# Altium PCB IBMExtender.PcbDoc (part 2 of 3)
Units mm, origin at the board's own origin, x right, y up, seen from the top; angles counter-clockwise.
Board outline 203.2 x 105.41 mm, 4 copper layers (F.Cu, In1.Cu, In2.Cu, B.Cu); 44 components, 158 nets, 598 pads, 425 vias.
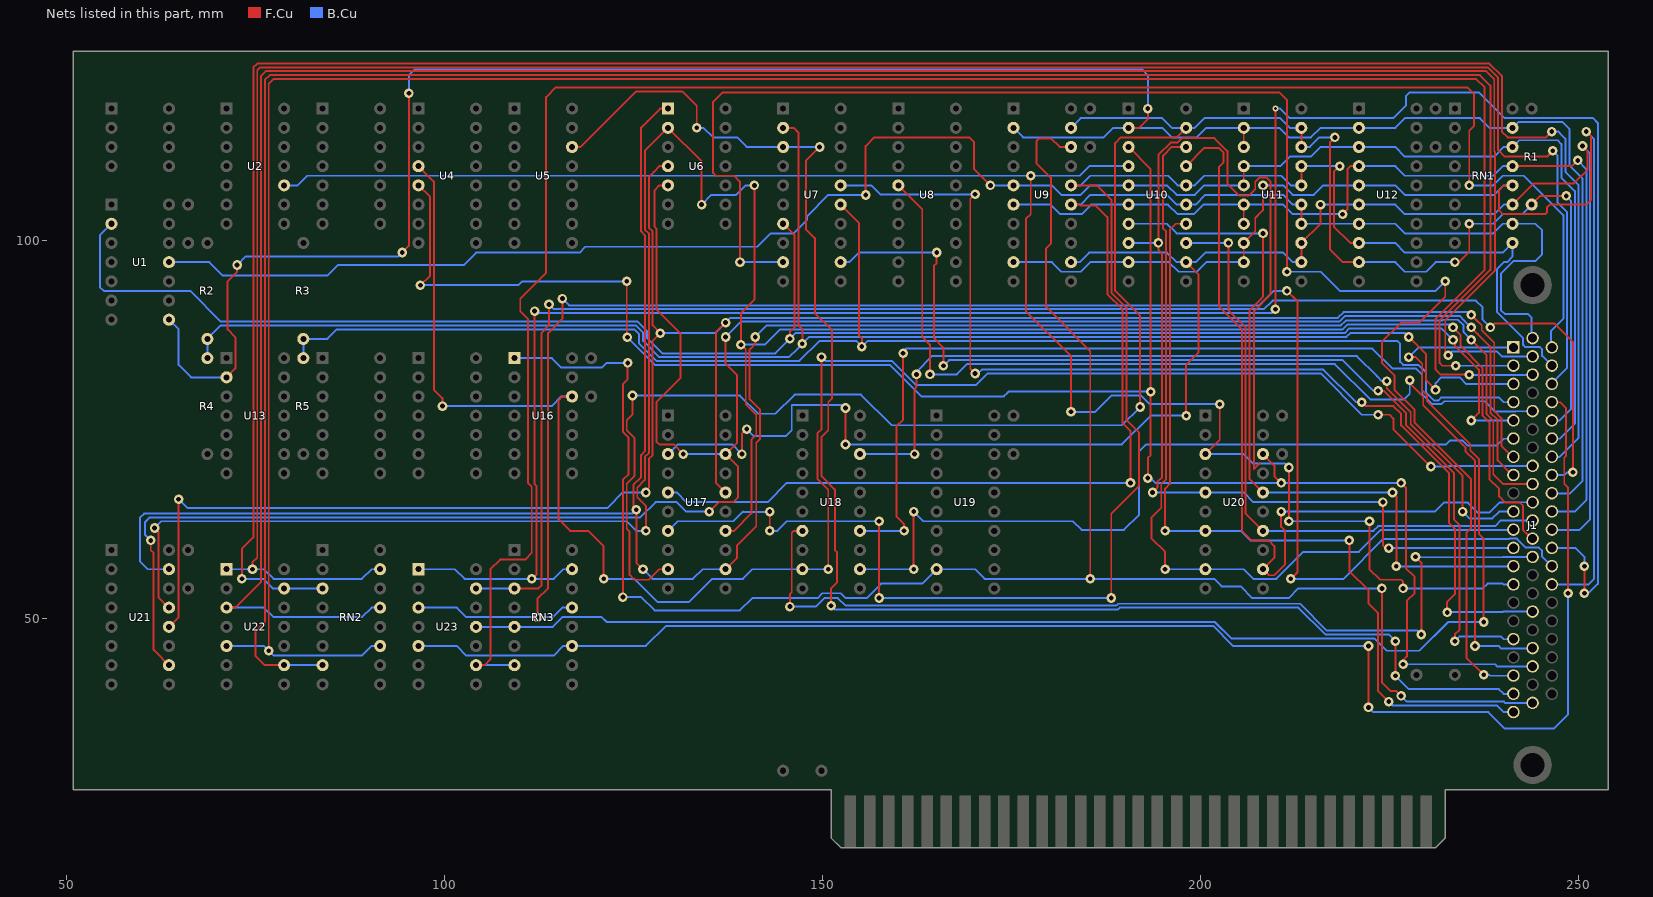
[diagram p4: the nets of this part, all layers, seen from the top]

## Via types
v1: diameter 1.27, hole 0.635, F.Cu to B.Cu, tented both sides, 360 vias
v2: diameter 1.524, hole 0.635, F.Cu to B.Cu, tented both sides, 62 vias
v3: diameter 0.762, hole 0.381, F.Cu to B.Cu, tented both sides, 3 vias

## Nets (pads, with @x,y where several pads share a name; then routed paths per layer and width w, separated by ;. In a path a pad name is that pad's centre, name@x,y a point inside that pad or via, vN(x,y) a via of type N, cw(c..) or ccw(c..) an arc to the next point about the centre after c; other vN are vias at no path point) (continued)
EA7: J1.42 U9.18 U16.1 U19.9 | length 262.8
  F.Cu w0.254: v1(123.571,52.832) 123.571,53.73 123.571,54.61 ; v1@123.571,53.213 123.571,54.61 ; 123.571,56.388 123.571,56.515 ; v1(124.206,83.82) 124.206,81.661 123.571,81.026 123.571,74.676 124.333,73.914 124.333,69.088 123.571,68.326 123.571,56.515 ; U9.18@182.88,112.395 181.356,112.395 180.213,113.538 178.689,113.538 178.308,113.157 178.308,110.236 180.213,108.331 180.213,99.612 179.578,98.977 179.578,91.226 185.42,85.384 185.42,71.965 185.42,56.143 v1(185.42,55.245) ; 224.028,42.291 224.028,42.418 ; v1(224.028,53.975) 224.028,42.418 ; v1(226.568,39.751) 225.933,40.386 225.171,40.386 224.028,41.529 224.028,42.418 ; 123.571,54.61 123.571,56.515
  B.Cu w0.254: U16.1@109.22,84.455 114.173,84.455 115.443,83.185 116.967,83.185 120.777,83.185 121.412,83.82 123.444,83.82 ; v1(123.571,52.832) 125.984,52.832 127.762,51.054 139.065,51.054 140.716,52.705 149.352,52.705 149.987,53.34 151.638,53.34 ; v1@124.079,83.82 123.444,83.82 ; v1(124.206,83.82) 123.444,83.82 ; v1(185.42,55.245) 181.356,55.245 ; 193.802,55.245 193.294,55.245 ; v1(224.028,53.975) 223.139,53.975 212.979,53.975 211.709,52.705 210.82,52.705 206.883,52.705 205.359,54.229 202.819,54.229 201.803,55.245 193.294,55.245 ; v1(226.568,39.751) 227.33,38.989 240.157,38.989 240.309,38.837 J1.42@243.967,38.837 ; 151.003,53.34 150.285,53.34 151.003,53.34 ; 151.003,53.34 151.638,53.34 ; 151.638,53.34 152.4,53.34 153.035,52.705 155.829,52.705 157.734,54.61 163.195,54.61 U19.9@165.1,56.515 166.231,56.515 170.18,56.515 171.45,55.245 181.356,55.245 ; 181.356,55.245 193.294,55.245
EA8: J1.40 U4.5 U10.3 U20.18 | length 252.3
  F.Cu w0.254: U4.5@96.52,107.315 98.044,105.791 98.044,95.504 98.044,95.377 v1(96.774,94.107) ; v1(124.079,94.615) 124.079,87.289 v1(124.162,87.205) ; U10.3@190.5,112.395 193.421,109.474 193.421,100.183 193.421,96.393 v1(193.421,80.01) 193.421,79.121 193.421,77.597 ; v1(193.04,68.58) 193.04,71.247 193.421,71.628 193.421,77.597 ; 193.421,79.375 193.421,77.597 ; U20.18@208.28,71.755 209.804,70.231 209.804,69.342 209.804,68.834 v1(210.693,67.945) ; v1(226.568,67.945) 227.203,67.31 227.203,56.642 228.346,55.499 228.346,53.34 227.33,52.324 227.33,44.989 226.822,44.481 v1(226.822,43.942)
  B.Cu w0.254: v1(96.774,94.107) 109.728,94.107 110.236,94.615 115.951,94.615 ; 116.84,94.615 115.951,94.615 ; 122.047,94.615 120.777,94.615 ; v1(124.079,94.615) 120.777,94.615 ; v1(124.162,87.205) 127.802,83.566 152.654,83.566 158.877,83.566 163.068,79.375 173.101,79.375 173.99,79.375 174.498,79.883 174.625,80.01 192.532,80.01 v1(193.421,80.01) ; v1(193.04,68.58) 193.421,68.58 194.056,67.945 209.804,67.945 v1(210.693,67.945) 211.709,67.945 225.425,67.945 v1(226.568,67.945) ; v1(226.822,43.942) 239.014,43.942 239.319,43.637 240.03,43.637 242.367,43.637 J1.40@243.84,43.637 ; 115.951,94.615 120.777,94.615
EA9: J1.14 U2.10 U10.4 U20.3 | length 234
  F.Cu w0.254: v1(177.546,108.585) 177.546,103.505 176.911,102.87 176.911,90.678 182.88,84.709 v1(182.88,77.343) ; U20.3@200.66,71.755 202.565,73.66 v1(202.565,78.359) ; v1(211.709,62.865) 211.709,69.438 v1(211.709,69.977) ; v1(222.377,62.865) 222.377,56.515 223.774,55.118 226.577,55.118 226.822,54.873 v1(226.822,53.975)
  B.Cu w0.254: U2.10@78.74,107.315 80.518,107.315 81.788,108.585 v1(177.546,108.585) 177.8,108.585 184.023,108.585 185.293,109.855 U10.4@190.5,109.855 ; v1(182.88,77.343) 186.055,77.343 188.214,79.502 192.151,79.502 193.294,78.359 v1(202.565,78.359) ; U20.3@200.66,71.755 201.791,71.755 205.74,71.755 207.01,70.485 211.201,70.485 v1(211.709,69.977) ; v1(211.709,62.865) 218.821,62.865 ; 220.853,62.865 218.821,62.865 ; v1(222.377,62.865) 218.821,62.865 ; v1(226.822,53.975) 237.363,53.975 237.998,54.61 240.006,54.61 240.133,54.483 J1.14@241.3,54.483
EA10: J1.13 U10.7 U20.16 | length 97.8
  F.Cu w0.254: U20.16@208.28,66.675 206.502,68.453 206.502,88.729 206.502,90.805 208.026,92.329 208.28,92.583 v1(208.28,100.965) ; v1(225.425,66.675) 225.933,66.167 225.933,65.532 v1(225.933,56.896)
  B.Cu w0.254: U10.7@190.5,102.235 195.58,102.235 196.85,100.965 207.556,100.965 ; v1@208.026,100.965 207.556,100.965 ; U20.16@208.28,66.675 209.411,66.675 224.663,66.675 ; v1(208.28,100.965) 207.556,100.965 ; v1@225.171,66.675 224.663,66.675 ; v1(225.425,66.675) 224.663,66.675 ; v1(225.933,56.896) 227.584,56.896 228.346,56.896 ; 228.092,56.896 228.346,56.896 ; J1.13@241.3,56.896 240.133,56.896 228.346,56.896
EA11: J1.12 U10.8 U20.5 | length 169.7
  F.Cu w0.254: v1(193.675,66.675) 194.183,67.183 194.31,67.31 194.31,68.072 194.945,68.707 194.945,98.289 194.437,98.797 v1(194.437,99.695) 194.437,98.679 194.437,111.335 196.063,112.962 196.939,112.962 197.553,113.576 201.848,113.576 203.581,111.843 203.581,107.548 205.173,105.956 206.393,105.956 207.264,106.827 207.264,107.803 207.792,108.331 208.768,108.331 209.296,107.803 209.296,92.881 207.099,90.684 207.099,69.782 207.891,70.574 ; v1(224.155,65.405) 224.155,59.69 224.536,59.309 v1(224.917,59.309)
  B.Cu w0.254: U10.8@190.5,99.695 193.675,99.695 ; v1(193.675,66.675) U20.5@200.66,66.675 205.74,66.675 207.01,65.405 209.55,65.405 223.139,65.405 v1(224.155,65.405) ; v1@194.31,99.695 193.675,99.695 ; v1(194.437,99.695) 193.675,99.695 ; v1(224.917,59.309) 226.949,59.309 227.838,59.309 ; 227.457,59.309 227.838,59.309 ; J1.12@241.3,59.309 227.838,59.309
EA12: J1.32 U10.13 U20.14 | length 81.8
  F.Cu w0.254: v1(203.708,99.695) 203.708,90.805 205.994,88.519 205.994,63.881 207.01,62.865 U20.14@208.28,61.595
  B.Cu w0.254: U10.13@198.12,99.695 v1(203.708,99.695) ; U20.14@208.28,61.595 222.885,61.595 223.52,62.23 239.014,62.23 239.751,62.967 J1.32@243.967,62.967
EA13: J1.21 U10.14 U20.7 | length 108
  F.Cu w0.254: v1(195.326,61.595) 195.326,67.183 195.961,67.818 195.961,101.473 196.723,102.235 U10.14@198.12,102.235 ; v1(219.71,60.325) 219.71,56.261 222.25,53.721 222.25,51.943 223.52,50.673 223.52,40.386 v1(224.917,38.989)
  B.Cu w0.254: v1(195.326,61.595) U20.7@200.66,61.595 205.359,61.595 206.629,60.325 212.852,60.325 v1(219.71,60.325) ; v1(224.917,38.989) 225.425,38.481 226.822,38.481 239.244,38.481 240.133,37.592 J1.21@241.3,37.592
EA14: J1.31 U10.17 U20.12 | length 113.4
  F.Cu w0.254: U10.17@198.12,109.855 200.533,112.268 202.438,112.268 203.073,111.633 203.073,110.363 202.438,109.728 202.438,91.313 205.486,88.265 205.486,61.595 206.756,60.325 209.042,60.325 209.804,59.563 209.804,58.039 U20.12@208.28,56.515 209.08,55.715 209.766,55.715 210.439,56.388 211.201,57.15 211.201,61.595 210.693,62.103 210.693,62.611 ; 210.693,63.5 210.693,62.611 ; v1(210.693,64.135) 210.693,62.611
  B.Cu w0.254: v1(210.693,64.135) 231.013,64.135 232.219,65.341 235.394,65.341 236.728,64.008 238.252,64.008 239.611,65.367 240.043,65.367 240.055,65.38 J1.31@243.967,65.38
EA15: J1.11 U10.18 U20.9 | length 109.1
  F.Cu w0.254: v1(195.326,56.515) 195.326,58.801 193.548,60.579 193.548,63.373 194.818,64.643 194.818,67.818 195.453,68.453 195.453,101.219 195.072,101.6 195.072,111.252 196.215,112.395 U10.18@198.12,112.395
  B.Cu w0.254: v1(195.326,56.515) U20.9@200.66,56.515 205.74,56.515 207.01,55.245 210.058,55.245 213.614,58.801 220.98,58.801 223.901,61.722 J1.11@241.3,61.722
EA16: J1.8 U6.5 U17.18 U21.10 | length 295.2
  F.Cu w0.254: v1(61.087,60.325) 61.087,59.055 61.468,58.674 61.468,45.847 61.722,45.593 U21.10@63.5,43.815 ; U6.5@129.54,107.315 128.409,107.315 127.762,106.668 127.762,101.854 128.016,101.6 128.016,90.932 131.191,87.757 131.191,81.788 128.016,78.613 128.016,73.406 128.397,73.025 130.302,73.025 v1(131.572,71.755) ; v1(135.001,64.135) 136.271,65.405 138.176,65.405 138.811,66.04 138.811,70.104 U17.18@137.16,71.755 138.684,73.279 138.684,82.169 137.16,83.693 v1(137.16,87.249) ; v1(235.839,88.519) 236.728,87.63 238.379,85.979 238.379,77.256 239.33,76.305 239.33,70.931 J1.8@241.3,68.961
  B.Cu w0.254: v1(61.087,60.325) 60.325,61.087 60.325,62.738 60.96,63.373 124.46,63.373 125.857,63.373 127.889,65.405 130.683,65.405 131.953,64.135 v1(135.001,64.135) ; v1(131.572,71.755) 132.588,71.755 ; v1@131.826,71.755 132.588,71.755 ; U17.18@137.16,71.755 132.588,71.755 ; v1(137.16,87.249) 139.192,89.281 218.396,89.281 219.158,90.043 234.315,90.043 234.95,89.408 v1(235.839,88.519)
EA17: J1.7 U6.4 U17.16 U21.12 | length 286.1
  F.Cu w0.254: U21.12@63.5,48.895 64.77,50.165 64.77,65.151 v1(64.77,65.786) ; v1(126.619,66.675) 126.619,66.929 127,67.31 127,71.12 127.508,71.628 127.508,77.597 ; 127.508,78.74 127.508,77.597 ; 127.508,86.351 127.508,85.725 ; U6.4@129.54,109.855 128.409,109.855 127.635,109.081 127.623,109.081 127,108.458 127,101.727 127.508,101.219 127.508,90.722 127.508,88.773 v1(128.524,87.757) 127.508,86.741 127.508,85.725 ; U17.16@137.16,66.675 135.89,67.945 135.89,87.884 136.144,88.138 v1(137.16,89.154) ; 236.728,89.281 v1(235.839,90.17) 237.236,88.773 237.236,88.138 237.256,88.138 238.887,86.507 238.887,77.466 239.838,76.516 239.838,72.836 J1.7@241.3,71.374 ; 127.508,77.597 127.508,85.725
  B.Cu w0.254: v1(64.77,65.786) 65.913,64.643 121.539,64.643 123.571,66.675 125.73,66.675 ; v1@126.365,66.675 125.73,66.675 ; v1(126.619,66.675) 125.73,66.675 ; v1(128.524,87.757) 130.683,87.757 ; v1@128.555,87.757 129.667,87.757 ; 129.794,87.757 129.667,87.757 ; v1(235.839,90.17) 235.458,90.551 234.569,90.551 218.948,90.551 218.186,89.789 142.24,89.789 139.319,89.789 137.795,89.789 v1(137.16,89.154) 135.763,87.757 133.731,87.757 130.683,87.757 ; 129.667,87.757 130.683,87.757
EA18: J1.33 U6.2 U17.14 U21.13 | length 336.6
  F.Cu w0.254: v1(61.595,61.976) 62.103,61.468 62.103,59.309 62.103,52.832 U21.13@63.5,51.435 ; v1(126.619,61.595) 126.619,64.897 125.476,66.04 125.476,67.31 126.492,68.326 126.492,71.374 127,71.882 127,78.232 ; 127,78.486 127,78.232 ; v1(133.985,104.775) 133.985,110.49 U6.2@129.54,114.935 126.492,111.887 126.492,101.473 127,100.965 127,90.511 127,78.232 ; U17.14@137.16,61.595 138.291,61.595 140.589,63.893 140.589,73.66 141.224,74.295 141.224,76.962 139.827,78.359 139.827,85.598 v1(139.192,86.233) 139.192,87.122 139.192,87.249 139.192,90.424 139.573,90.805 140.97,92.202 v1(140.97,107.315) ; v1(233.426,88.519) 234.442,87.503 234.442,86.062 237.363,83.141 237.363,76.835 238.252,75.946 238.252,68.409 239.522,67.139 239.522,66.167 240.347,65.341 240.728,65.341 242.252,65.341 242.697,64.897 242.697,61.671 J1.33@243.84,60.528
  B.Cu w0.254: v1(61.595,61.976) 62.23,62.611 62.484,62.865 124.079,62.865 125.349,61.595 125.73,61.595 ; v1@126.238,61.595 125.73,61.595 ; v1(126.619,61.595) 125.73,61.595 ; v1(133.985,104.775) 135.255,106.045 135.636,106.045 138.557,106.045 139.7,107.188 139.7,107.197 139.818,107.315 139.954,107.315 ; 140.09,86.233 v1(139.192,86.233) 142.367,86.233 143.256,87.122 ; v1@140.716,107.315 139.954,107.315 ; v1(140.97,107.315) 139.954,107.315 ; 143.129,86.995 143.256,87.122 ; 145.796,88.265 147.32,88.265 ; v1@233.426,88.392 232.918,88.9 ; v1(233.426,88.519) 233.299,88.519 232.918,88.9 ; 143.256,87.122 144.399,88.265 147.32,88.265 ; 147.32,88.265 218.821,88.265 219.456,88.9 232.918,88.9
EA19: J1.30 U6.1 U17.12 U21.15 | length 309.1
  F.Cu w0.254: v1(126.238,56.515) 125.349,57.404 v1(125.349,64.389) 125.349,64.262 124.968,64.643 124.968,67.691 125.984,68.707 125.984,71.628 126.492,72.136 126.492,90.301 126.492,100.711 125.984,101.219 125.984,114.973 126.835,115.824 ; 126.238,115.227 126.835,115.824 ; U6.1@129.54,117.475 128.486,117.475 126.835,115.824 ; U17.12@137.16,56.515 138.684,58.039 138.684,59.69 141.224,62.23 141.224,73.279 141.732,73.787 141.732,77.597 140.335,78.994 140.335,85.598 140.453,85.716 140.462,85.716 141.097,86.351 v1(141.097,87.249) ; v1(235.839,86.868) 237.871,84.836 237.871,77.045 238.76,76.156 238.76,69.113 240.106,67.767 J1.30@243.84,67.767
  B.Cu w0.254: U21.15@63.5,56.515 60.706,56.515 59.69,57.531 59.69,63.373 60.198,63.881 122.301,63.881 124.841,63.881 v1(125.349,64.389) ; v1(126.238,56.515) 127.508,55.245 127.635,55.245 132.842,55.245 134.112,56.515 U17.12@137.16,56.515 ; v1(141.097,87.249) 142.621,88.773 218.607,88.773 219.242,89.408 232.029,89.408 232.156,89.535 234.061,89.535 234.823,88.773 234.823,87.884 v1(235.839,86.868)
EAEN: J1.29 U4.4 U16.12 U18.9 | length 246.2
  F.Cu w0.254: U4.4@96.52,109.855 98.552,107.823 98.552,80.295 99.695,79.152 v1(99.695,78.105) ; U16.12@116.84,79.375 115.57,79.375 115.062,78.867 115.062,63.119 116.586,61.595 118.999,61.595 119.761,60.833 ; 120.269,60.325 119.761,60.833 ; v1(121.031,55.245) 121.031,59.563 119.761,60.833 ; v1(149.86,84.582) 149.86,75.057 149.352,74.549 149.352,68.453 150.749,67.056 v1(150.749,56.515) ; v1(223.52,76.962) 224.917,76.962 225.044,76.962 225.552,76.454 225.552,75.057 v1(230.505,70.104)
  B.Cu w0.254: v1(99.695,78.105) 100.965,78.105 ; v1@100.203,78.105 100.965,78.105 ; U16.12@116.84,79.375 115.443,79.375 114.173,78.105 100.965,78.105 ; v1(121.031,55.245) 125.095,55.245 125.603,54.737 128.143,52.197 132.334,52.197 135.382,55.245 139.446,55.245 140.716,56.515 U18.9@147.32,56.515 v1@150.114,56.515 ; v1(149.86,84.582) 150.368,84.074 151.003,84.074 152.864,84.074 158.96,84.074 159.131,84.074 162.306,80.899 170.307,80.899 171.831,82.423 215.9,82.423 221.361,76.962 222.377,76.962 v1(223.52,76.962) ; v1@150.241,56.515 v1@150.114,56.515 ; v1(150.749,56.515) v1@150.114,56.515 ; v1(230.505,70.104) 231.775,70.104 ; 231.14,70.104 231.775,70.104 ; J1.29@243.84,70.18 243.853,70.168 241.021,70.168 232.88,70.168 232.816,70.104 231.775,70.104
EALE: J1.26 U18.14 | length 120.3
  F.Cu w0.254: v1(160.655,85.09) 160.655,76.327 159.766,75.438 159.766,63.627 159.766,63.509 160.782,62.493 v1(160.782,61.595)
  B.Cu w0.254: U18.14@154.94,61.595 159.004,61.595 ; v1@160.274,61.595 159.004,61.595 ; v1(160.655,85.09) 160.655,85.344 161.036,85.725 222.758,85.725 225.425,83.058 228.556,83.058 229.362,82.252 229.362,79.688 230.691,78.359 231.902,78.359 232.283,78.74 237.617,78.74 238.95,77.406 241.7,77.406 241.712,77.419 242.673,77.419 ; v1(160.782,61.595) 159.004,61.595 ; 242.66,77.406 242.673,77.419 ; J1.26@243.84,77.419 242.673,77.419
ECLK: J1.5 U1.2 U7.7 | length 228.3
  F.Cu w0.254: U7.7@144.78,102.235 146.304,100.711 146.304,96.266 146.304,88.646 146.304,88.549 145.669,87.914 v1(145.669,87.016) ; v1(233.426,86.868) 233.68,86.614 233.68,86.106 236.855,82.931 236.855,77.851 236.855,77.216 v1(235.839,76.2)
  B.Cu w0.254: U1.2@55.88,102.235 54.356,100.711 54.356,93.853 54.864,93.345 66.294,93.345 70.358,89.281 125.516,89.281 126.746,88.051 126.746,87.122 128.778,85.09 143.743,85.09 144.886,86.233 v1(145.669,87.016) 146.41,87.757 219.075,87.757 219.71,88.392 231.902,88.392 v1(233.426,86.868) ; v1(235.839,76.2) 237.49,76.2 J1.5@241.3,76.2
ED0: J1.51 RN1.15 U1.8 U9.2 U10.2 U11.2 U11.3 U12.2 U13.2 | length 317.1
  F.Cu w0.254: U13.2@71.12,81.915 72.301,83.096 72.301,87.211 71.247,88.265 71.247,92.202 71.247,93.98 71.247,94.606 72.517,95.876 v1(72.517,96.774) ; v1(94.361,98.425) 95.25,99.314 95.25,117.475 ; 95.25,117.856 95.25,117.475 ; v1(95.25,119.507) 95.25,117.475 ; U10.2@190.5,114.935 191.897,114.935 193.04,116.078 v1(193.04,117.475) ; U11.3@205.74,112.395 U11.2@205.74,114.935
  B.Cu w0.254: U1.8@63.5,89.535 64.77,88.265 64.77,83.566 66.421,81.915 U13.2@71.12,81.915 ; v1(72.517,96.774) 73.66,97.917 74.803,97.917 78.74,97.917 78.994,97.917 83.439,97.917 84.074,97.917 87.63,97.917 87.757,97.917 93.853,97.917 v1(94.361,98.425) ; v1(95.25,119.507) 95.25,121.92 96.012,122.682 99.993,122.682 192.278,122.682 193.04,121.92 v1(193.04,117.475) ; U9.2@175.26,114.935 176.53,113.665 187.198,113.665 188.468,114.935 U10.2@190.5,114.935 194.945,114.935 196.215,113.665 199.517,113.665 200.787,114.935 U11.2@205.74,114.935 210.439,114.935 211.709,113.665 214.63,113.665 215.9,114.935 U12.2@220.98,114.935 225.806,114.935 227.076,116.205 236.982,116.205 238.252,114.935 RN1.15@241.3,114.935 242.062,115.697 247.938,115.697 248.827,114.808 248.827,109.948 250.571,108.204 250.571,68.199 248.92,66.548 J1.51@246.38,66.548
ED1: J1.48 RN1.14 U1.11 U9.5 U10.5 U11.4 U11.5 U12.3 | length 250.7
  F.Cu w0.254: v1(155.702,106.045) 155.702,112.522 156.845,113.665 169.418,113.665 170.053,113.03 170.053,109.855 170.053,109.474 v1(172.212,107.315) ; U11.5@205.74,107.315 U11.4@205.74,109.855
  B.Cu w0.254: U1.11@63.5,97.155 68.834,97.155 70.612,95.377 84.455,95.377 85.852,96.774 102.489,96.774 104.14,98.425 117.856,98.425 118.618,99.187 141.351,99.187 143.129,100.965 146.177,100.965 147.955,102.743 147.955,103.251 150.749,106.045 154.686,106.045 ; 154.94,106.045 154.686,106.045 ; v1(155.702,106.045) 154.686,106.045 ; v1(172.212,107.315) 172.593,107.315 U9.5@175.26,107.315 180.34,107.315 181.61,106.045 184.15,106.045 185.42,107.315 U10.5@190.5,107.315 195.58,107.315 196.85,106.045 199.263,106.045 200.533,107.315 U11.5@205.74,107.315 ; U11.4@205.74,109.855 210.566,109.855 211.836,111.125 214.63,111.125 215.9,112.395 U12.3@220.98,112.395 225.806,112.395 227.076,111.125 238.899,111.125 240.169,112.395 RN1.14@241.3,112.395 242.189,113.284 247.269,113.284 247.777,112.776 247.777,108.331 249.555,106.553 249.555,75.795 247.547,73.787 J1.48@246.38,73.787
ED2: J1.52 RN1.13 U9.6 U10.6 U11.6 U11.7 U12.4 | length 138.8
  F.Cu w0.254: U11.7@205.74,102.235 205.74,103.644 U11.6@205.74,104.775 ; v1(218.821,103.505) 219.456,104.14 219.456,109.462 219.849,109.855 U12.4@220.98,109.855 ; RN1.13@241.3,109.855 249.174,109.855 v1(249.936,110.617)
  B.Cu w0.254: U9.6@175.26,104.775 180.213,104.775 181.483,103.505 184.277,103.505 185.547,104.775 U10.6@190.5,104.775 195.707,104.775 196.977,103.505 199.136,103.505 200.406,104.775 U11.6@205.74,104.775 210.947,104.775 212.217,103.505 v1(218.821,103.505) ; U12.4@220.98,109.855 225.806,109.855 227.076,108.585 238.76,108.585 240.03,109.855 RN1.13@241.3,109.855 ; J1.52@246.38,64.135 249.555,64.135 251.079,65.659 251.079,106.172 ; v1(249.936,110.617) 251.079,109.474 251.079,108.712 ; 251.079,106.893 251.079,106.172 ; 251.079,109.093 251.079,108.712 ; 251.079,106.172 251.079,108.712
ED3: J1.56 RN1.12 U9.9 U10.9 U11.8 U11.9 U12.5 | length 172.9
  F.Cu w0.254: U11.9@205.74,97.155 U11.8@205.74,99.695 207.264,101.219 207.264,102.997 208.153,103.886 208.28,104.013 v1(208.28,107.315) ; RN1.12@241.3,107.315 240.157,107.315 239.522,106.68 239.522,104.013 240.03,103.505 245.618,103.505 245.872,103.759 245.872,104.394 246.253,104.775 251.079,104.775 251.714,105.41 251.714,111.379 ; v1(251.079,114.427) 251.714,113.792 251.714,111.379 ; 251.714,111.633 251.714,111.379
  B.Cu w0.254: U9.9@175.26,97.155 180.34,97.155 181.61,95.885 184.15,95.885 185.42,97.155 U10.9@190.5,97.155 195.834,97.155 197.104,95.885 199.517,95.885 200.787,97.155 U11.9@205.74,97.155 ; v1(208.28,107.315) 209.042,107.315 ; v1@208.534,107.315 209.042,107.315 ; RN1.12@241.3,107.315 240.169,107.315 238.899,106.045 227.076,106.045 225.806,107.315 U12.5@220.98,107.315 216.281,107.315 215.011,106.045 212.217,106.045 210.947,107.315 209.296,107.315 209.042,107.315 ; J1.56@246.38,54.483 251.333,54.483 252.095,55.245 252.095,65.238 252.095,110.856 252.095,111.252 252.095,113.411 v1(251.079,114.427)
ED4: J1.53 RN1.11 U9.12 U10.12 U11.12 U11.13 U12.6 U17.3 | length 243.4
  F.Cu w0.254: v1(139.319,71.755) 139.319,73.914 139.319,74.422 v1(139.954,75.057) ; v1(153.035,73.025) 153.035,77.312 v1(153.035,77.851) ; v1(198.12,76.835) 198.12,83.566 199.771,85.217 199.771,95.504 U10.12@198.12,97.155 ; U11.12@213.36,97.155 213.36,98.564 U11.13@213.36,99.695 215.9,102.235 v1(215.9,104.775) ; RN1.11@241.3,104.775 244.094,107.569 249.428,107.569 251.206,109.347 251.206,111.887 v1(250.571,112.522)
  B.Cu w0.254: U17.3@129.54,71.755 130.34,72.555 130.81,73.025 138.049,73.025 v1(139.319,71.755) ; v1(139.954,75.057) 140.843,74.168 143.51,74.168 145.161,74.168 145.923,74.93 145.923,78.232 152.654,78.232 v1(153.035,77.851) ; v1(153.035,73.025) 189.611,73.025 193.421,76.835 v1(198.12,76.835) ; U9.12@182.88,97.155 184.011,97.155 185.281,98.425 195.58,98.425 196.85,97.155 U10.12@198.12,97.155 199.39,97.155 200.66,98.425 210.959,98.425 212.229,97.155 U11.12@213.36,97.155 ; v1(215.9,104.775) 219.849,104.775 U12.6@220.98,104.775 225.806,104.775 227.076,103.505 238.899,103.505 240.169,104.775 RN1.11@241.3,104.775 ; J1.53@246.38,61.722 250.19,61.722 251.587,63.119 251.587,110.236 251.587,111.252 251.587,111.506 v1(250.571,112.522)
ED5: J1.22 RN1.10 U9.15 U10.15 U11.14 U11.15 U12.7 U17.5 | length 194.9
  F.Cu w0.254: U9.15@182.88,104.775 184.011,104.775 184.138,104.648 186.182,104.648 187.706,103.124 187.706,92.924 189.698,90.932 189.698,75.859 190.754,74.803 v1(190.754,67.945) ; U11.14@213.36,102.235 213.36,103.644 U11.15@213.36,104.775
  B.Cu w0.254: U17.5@129.54,66.675 130.671,66.675 131.941,65.405 142.748,65.405 145.288,67.945 189.23,67.945 v1(190.754,67.945) ; U9.15@182.88,104.775 184.15,104.775 185.42,106.045 195.58,106.045 196.85,104.775 U10.15@198.12,104.775 199.39,104.775 200.66,106.045 210.947,106.045 212.217,104.775 U11.15@213.36,104.775 ; U11.14@213.36,102.235 219.849,102.235 U12.7@220.98,102.235 225.806,102.235 227.076,100.965 238.76,100.965 240.03,102.235 RN1.10@241.3,102.235 243.078,102.235 244.348,102.235 245.237,101.346 245.237,98.171 244.348,97.282 241.427,97.282 239.776,95.631 239.776,90.805 240.284,90.297 243.332,90.297 243.84,89.789 J1.22@243.84,87.071
ED6: J1.44 RN1.9 U9.16 U10.16 U11.16 U11.17 U12.8 U17.7 | length 235.1
  F.Cu w0.254: v1(143.002,61.595) 143.002,63.237 v1(143.002,64.135) ; v1(157.48,52.705) v1(157.48,62.865) ; U9.16@182.88,107.315 186.309,107.315 188.214,105.41 188.214,93.135 190.206,91.142 190.206,79.923 190.246,79.883 190.246,76.2 191.897,74.549 191.897,67.579 188.199,63.881 188.199,52.72 v1(188.214,52.705) ; U11.16@213.36,107.315 213.36,108.446 U11.17@213.36,109.855 ; v1@218.059,109.474 v1(218.44,109.855) 217.678,109.093 217.678,101.866 219.849,99.695 U12.8@220.98,99.695
  B.Cu w0.254: U17.7@129.54,61.595 130.81,62.865 138.176,62.865 138.43,63.119 ; 139.065,63.754 138.43,63.119 ; v1@142.875,64.11 142.113,64.11 ; v1(143.002,61.595) 144.018,61.595 145.288,62.865 156.718,62.865 ; v1(143.002,64.135) 142.977,64.11 142.113,64.11 ; v1@156.972,62.865 156.718,62.865 ; v1(157.48,52.705) 184.404,52.705 186.944,52.705 ; v1(157.48,62.865) 156.718,62.865 ; U9.16@182.88,107.315 184.15,107.315 185.42,108.585 195.719,108.585 196.989,107.315 U10.16@198.12,107.315 199.251,107.315 200.521,108.585 210.693,108.585 211.963,107.315 U11.16@213.36,107.315 ; 187.325,52.705 186.944,52.705 ; v1(188.214,52.705) 186.944,52.705 ; U11.17@213.36,109.855 216.154,109.855 ; v1@218.059,109.855 216.154,109.855 ; v1(218.44,109.855) 216.154,109.855 ; U12.8@220.98,99.695 225.806,99.695 227.076,98.425 240.03,98.425 RN1.9@241.3,99.695 241.3,97.873 240.582,97.155 240.157,97.155 239.268,96.266 239.268,95.841 239.268,90.551 242.722,87.097 242.722,86.208 243.014,85.915 244.919,85.915 245.237,85.598 245.237,84.734 J1.44@246.507,83.464 ; 138.43,63.119 139.446,64.135 139.471,64.11 142.113,64.11
ED7: J1.47 R1.2 U9.19 U10.19 U11.18 U11.19 U12.9 U17.9 | length 276.2
  F.Cu w0.254: v1(124.841,79.502) 124.841,76.962 124.079,76.2 124.079,74.93 125.095,73.914 125.095,68.834 124.079,67.818 124.079,61.849 124.46,61.468 124.46,55.753 125.095,55.118 127.012,55.118 128.409,56.515 U17.9@129.54,56.515 ; v1(192.024,77.978) 192.024,79.248 192.024,90.043 188.722,93.345 188.722,112.903 189.484,113.665 192.913,113.665 ; 193.04,113.665 192.913,113.665 ; U10.19@198.12,114.935 196.85,113.665 192.913,113.665 ; U11.18@213.36,112.395 213.36,113.804 U11.19@213.36,114.935 ; v1(217.805,113.665) 217.17,113.03 217.17,98.806 218.821,97.155 U12.9@220.98,97.155 ; v1(233.68,97.155) 234.219,97.155 235.585,98.521 235.585,101.696 v1(235.585,102.235) ; R1.2@243.84,104.775 244.983,105.918 v1(248.412,105.918)
  B.Cu w0.254: v1@124.714,79.502 v1(124.841,79.502) 139.065,79.502 141.478,77.089 143.764,77.089 146.304,79.629 155.067,79.629 159.131,75.565 181.737,75.565 187.452,75.565 188.468,75.565 ; U9.19@182.88,114.935 184.15,116.205 194.945,116.205 196.215,114.935 U10.19@198.12,114.935 199.251,114.935 200.521,116.205 210.566,116.205 211.836,114.935 U11.19@213.36,114.935 ; 189.23,75.565 188.468,75.565 ; v1(192.024,77.978) 189.611,75.565 188.722,75.565 188.468,75.565 ; U11.18@213.36,112.395 214.491,112.395 215.761,113.665 v1(217.805,113.665) ; U12.9@220.98,97.155 225.806,97.155 227.076,95.885 229.87,95.885 231.14,97.155 v1(233.68,97.155) ; v1(235.585,102.235) 238.76,102.235 240.03,103.505 242.57,103.505 R1.2@243.84,104.775 ; J1.47@246.38,76.2 247.547,76.2 249.047,77.7 249.047,105.283 v1(248.412,105.918)
EDACK0#: J1.10 U18.18 | length 112.4
  F.Cu w0.254: v1(162.179,71.755) 162.179,79.502 ; 162.179,79.883 162.179,79.502 ; v1@162.433,82.677 162.433,80.645 162.179,80.391 162.179,79.502 ; 224.663,80.772 224.663,80.645 ; v1(224.663,81.407) 224.663,80.645 ; v1(234.696,64.135) 234.696,68.854 227.838,75.712 227.838,77.299 225.171,79.966 224.663,80.474 224.663,80.645
  B.Cu w0.254: U18.18@154.94,71.755 156.071,71.755 v1(162.179,71.755) ; v1(162.433,82.296) 162.433,82.677 164.465,84.709 220.726,84.709 223.393,82.042 224.028,81.407 v1(224.663,81.407) ; v1(234.696,64.135) 235.585,63.246 238.633,63.246 239.522,64.135 J1.10@241.3,64.135
EDACK1#: J1.17 U7.12 | length 135.8
  F.Cu w0.254: v1(165.1,98.425) 165.1,97.028 164.719,96.647 164.719,96.266 164.719,87.122 165.989,85.852 165.989,84.591 165.989,84.201 ; v1(165.989,83.439) 165.989,84.201 ; v1@165.989,83.693 165.989,84.201 ; v1(223.52,80.137) 224.282,80.137 ; v1@223.774,80.137 224.282,80.137 ; v1(233.68,46.99) 233.68,47.888 234.315,48.523 234.315,62.357 233.553,63.119 233.553,69.278 227.203,75.628 227.203,77.216 224.282,80.137
  B.Cu w0.254: U7.12@152.4,97.155 153.531,97.155 154.801,98.425 163.449,98.425 v1(165.1,98.425) ; v1(165.989,83.439) 166.751,84.201 218.821,84.201 222.885,80.137 v1(223.52,80.137) ; v1(233.68,46.99) 234.315,47.625 236.601,47.625 239.752,47.625 240.133,47.244 J1.17@241.3,47.244
EDACK2#: J1.19 U7.9 | length 220.3
  F.Cu w0.254: v1(139.065,97.155) 139.065,107.823 138.303,108.585 135.89,108.585 135.509,108.966 135.509,118.379 136.764,119.634 210.439,119.634 211.455,118.618 v1(211.455,95.885) ; v1(232.41,94.615) 232.41,92.583 228.981,89.154 226.568,89.154 224.028,86.614 224.028,83.82 225.679,82.169 225.679,80.264 228.346,77.597 228.346,75.922 235.839,68.429 235.839,61.976 235.204,61.341 235.204,44.831 v1(237.49,42.545)
  B.Cu w0.254: v1(139.065,97.155) 140.208,97.155 ; v1@139.446,97.155 140.208,97.155 ; 139.7,97.155 140.208,97.155 ; U7.9@144.78,97.155 140.208,97.155 ; v1(211.455,95.885) 212.217,95.885 ; v1@212.052,95.885 212.217,95.885 ; v1(232.41,94.615) 231.14,93.345 229.616,93.345 218.44,93.345 215.9,95.885 212.217,95.885 ; v1(237.49,42.545) 238.252,42.545 238.379,42.418 J1.19@241.3,42.418
EDACK3#: J1.37 U7.16 | length 143.5
  F.Cu w0.254: v1(170.18,82.423) 169.545,83.058 169.545,105.537 170.142,106.134 v1(170.18,106.134) ; v1(221.361,78.613) 221.869,78.105 225.552,78.105 226.568,77.089 226.568,75.545 232.918,69.195 232.918,62.611 233.68,61.849 233.68,53.213 232.664,52.197 v1(232.664,50.8)
  B.Cu w0.254: U7.16@152.4,107.315 156.464,107.315 157.645,106.134 169.418,106.134 v1(170.18,106.134) ; v1(170.18,82.423) 170.561,82.423 171.069,82.931 172.212,82.931 ; 171.958,82.931 172.212,82.931 ; v1(221.361,78.613) 220.599,78.613 216.281,82.931 215.9,82.931 172.212,82.931 ; v1(232.664,50.8) 232.727,50.863 233.934,50.863 ; v1@233.236,50.863 233.934,50.863 ; J1.37@243.967,50.902 240.068,50.902 240.03,50.863 233.934,50.863
EDIR#: J1.3 R2.1 R4.2 U7.2 | length 216.9
  F.Cu w0.254: U7.2@144.78,114.935 146.177,114.935 146.812,114.3 146.812,112.014 146.812,100.501 146.812,88.773 147.32,88.265 147.32,87.28 147.32,87.258 v1(147.32,86.36) ; v1(227.584,87.249) 228.219,86.614 229.87,84.963 229.87,82.169 229.87,81.494 v1(231.12,80.244)
  B.Cu w0.254: R4.2@68.58,84.455 68.58,85.586 R2.1@68.58,86.995 70.358,88.773 88.011,88.773 125.222,88.773 125.305,88.773 126.238,87.84 126.238,87.289 126.238,86.741 128.397,84.582 145.542,84.582 146.685,85.725 v1(147.32,86.36) 148.209,87.249 219.329,87.249 219.837,87.757 227.076,87.757 v1(227.584,87.249) ; v1(231.12,80.244) 231.12,81.142 231.893,81.915 234.315,81.915 235.204,81.026 J1.3@241.3,81.026
EDRQ1: J1.23 RN2.13 U22.3 | length 309.3
  F.Cu w0.254: U22.3@71.12,51.435 72.251,51.435 75.692,54.876 75.692,121.793 76.327,122.428 237.831,122.428 238.887,121.372 238.887,111.804 239.014,111.677 239.014,96.056 232.41,89.452 232.41,85.598 232.41,85.217 v1(232.791,84.836)
  B.Cu w0.254: U22.3@71.12,51.435 75.311,51.435 76.073,51.435 77.343,50.165 77.978,50.165 89.039,50.165 90.309,51.435 RN2.13@91.44,51.435 ; v1(232.791,84.836) 233.299,85.344 239.243,85.344 239.903,84.684 J1.23@243.967,84.684
EDRQ2: J1.2 RN2.7 U22.9 | length 299
  F.Cu w0.254: U22.9@78.74,43.815 76.2,43.815 74.93,45.085 74.93,48.26 76.2,49.53 76.2,121.285 76.835,121.92 236.982,121.92 238.379,120.523 238.379,96.139 238.335,96.139 231.648,89.452 231.648,84.582 ; 231.648,84.963 231.648,84.582 ; v1@233.68,83.312 v1(233.807,83.439) 232.029,83.439 231.648,83.82 231.648,84.582
  B.Cu w0.254: U22.9@78.74,43.815 79.871,43.815 RN2.7@83.82,43.815 ; v1(233.807,83.439) J1.2@241.3,83.439
EDRQ3: J1.24 RN2.11 U22.5 | length 311.7
  F.Cu w0.254: v1(76.708,45.72) 76.708,46.618 76.708,46.894 ; 76.708,46.872 76.708,46.894 ; v1(235.585,82.245) 235.534,82.296 231.775,82.296 231.14,82.931 231.14,87.249 231.14,89.662 237.617,96.139 237.617,120.269 236.474,121.412 77.343,121.412 76.708,120.777 76.708,46.894
  B.Cu w0.254: U22.5@71.12,46.355 75.184,46.355 ; 75.819,46.355 75.184,46.355 ; RN2.11@91.44,46.355 90.309,46.355 89.039,45.085 78.486,45.085 77.343,45.085 v1(76.708,45.72) 76.073,46.355 75.184,46.355 ; v1(235.585,82.245) 236.474,82.245 J1.24@243.84,82.245
EENABLE: J1.4 R3.1 R5.2 U7.15 | length 195
  F.Cu w0.254: U7.15@152.4,104.775 154.813,102.362 154.813,87.503 155.194,87.122 v1(155.194,85.979)
  B.Cu w0.254: R5.2@81.28,84.455 81.28,85.586 R3.1@81.28,86.995 84.455,86.995 85.725,88.265 125.095,88.265 125.73,87.63 125.73,86.36 128.016,84.074 146.939,84.074 149.606,86.741 152.908,86.741 ; 153.797,86.741 152.908,86.741 ; 156.591,86.741 156.718,86.741 156.845,86.741 ; J1.4@241.3,78.613 240.133,78.613 239.498,79.248 231.902,79.248 231.521,78.867 230.901,78.867 229.87,79.898 229.87,82.55 228.854,83.566 226.822,83.566 226.441,83.947 226.441,86.36 226.06,86.741 156.845,86.741 ; 152.908,86.741 154.432,86.741 v1(155.194,85.979) 155.956,86.741 156.845,86.741
EIOCHCK#: J1.49 RN2.3 U22.13 | length 307.6
  F.Cu w0.254: v1(73.152,55.245) 73.152,59.197 74.676,60.721 74.676,121.372 74.676,122.936 75.184,123.444 98.171,123.444 ; 98.298,123.444 98.171,123.444 ; v1(246.507,114.427) 245.872,113.792 245.745,113.665 240.665,113.665 239.903,114.427 239.903,121.793 238.252,123.444 98.171,123.444
  B.Cu w0.254: v1(73.152,55.245) 75.946,55.245 77.216,53.975 77.609,53.975 U22.13@78.74,53.975 RN2.3@83.82,53.975 ; J1.49@246.38,71.374 247.547,71.374 250.063,73.89 250.063,107.349 248.319,109.093 248.319,113.504 247.523,114.3 247.523,114.309 247.405,114.427 v1(246.507,114.427)
EIOCHRDY: J1.45 RN2.15 U22.1 | length 303.3
  F.Cu w0.254: v1(74.549,56.515) 74.549,57.413 75.184,58.048 75.184,121.583 75.184,122.555 75.565,122.936 238.042,122.936 239.395,121.583 239.395,112.014 240.284,111.125 245.872,111.125 v1(246.634,111.887)
  B.Cu w0.254: U22.1@71.12,56.515 v1(74.549,56.515) 76.073,56.515 77.343,55.245 89.039,55.245 90.309,56.515 RN2.15@91.44,56.515 ; J1.45@246.38,81.026 248.539,83.185 248.539,103.759 247.269,105.029 247.269,105.918 247.269,110.109 ; v1(246.634,111.887) 247.269,111.252 247.269,111.125 247.269,110.109 ; 247.269,110.744 247.269,110.109
EIOR#: J1.39 U8.5 | length 146.4
  F.Cu w0.254: U8.5@160.02,107.315 163.195,104.14 163.195,87.249 164.211,86.233 164.211,83.947 ; v1(164.211,82.296) 164.211,83.947 ; v1@164.211,82.677 164.211,83.312 ; 164.211,82.931 164.211,83.312 ; v1(227.711,81.534) 227.711,81.153 228.839,80.025 228.839,80.01 229.489,79.36 229.489,78.232 235.077,72.644 235.077,72.136 236.347,70.866 v1(236.347,46.355) ; 164.211,83.312 164.211,83.947
  B.Cu w0.254: v1(164.211,82.296) 167.767,82.296 169.164,83.693 215.773,83.693 216.027,83.693 ; 216.237,83.693 216.027,83.693 ; 223.266,78.994 224.663,78.994 ; 223.393,78.994 223.647,78.994 ; 226.314,78.994 225.552,78.994 ; v1(227.711,81.534) 227.711,79.756 226.949,78.994 225.552,78.994 ; 237.245,46.355 v1(236.347,46.355) 239.471,46.355 239.776,46.05 240.284,46.05 242.621,46.05 J1.39@243.84,46.05 ; 216.027,83.693 217.805,83.693 217.805,83.673 222.484,78.994 223.647,78.994 ; 223.647,78.994 224.663,78.994 ; 224.663,78.994 225.552,78.994
EIOW#: J1.20 U5.14 U7.3 | length 205.2
  F.Cu w0.254: U5.14@116.84,112.395 117.971,112.395 125.337,119.761 131.445,119.761 133.35,117.856 v1(133.35,114.935) ; v1(149.606,112.395) 147.828,110.617 147.828,101.473 148.971,100.33 148.971,90.424 151.257,88.138 151.257,79.121 150.749,78.613 150.749,74.93 149.86,74.041 149.86,68.834 151.638,67.056 151.638,59.055 151.892,58.801 151.892,54.737 151.13,53.975 151.13,52.587 v1(151.13,51.689) ; v1(225.806,42.418) 225.806,43.434 ; v1@225.806,42.799 225.806,43.434 ; v1(225.806,46.99) 225.806,46.228 225.806,43.434
  B.Cu w0.254: v1(133.35,114.935) v1@133.858,114.935 ; v1@133.477,114.935 v1@133.858,114.935 ; v1@149.352,112.395 v1@149.098,112.395 ; v1(151.13,51.689) 151.638,51.181 152.825,51.181 189.059,51.181 189.313,51.435 212.979,51.435 216.535,47.879 224.917,47.879 v1(225.806,46.99) ; v1(225.806,42.418) 227.584,40.64 228.473,40.64 ; 228.346,40.64 228.473,40.64 ; J1.20@241.3,40.005 240.133,40.005 239.498,40.64 228.473,40.64 ; v1@133.858,114.935 134.239,114.935 135.509,113.665 138.684,113.665 139.954,112.395 U7.3@144.78,112.395 148.844,112.395 ; 148.844,112.395 v1(149.606,112.395) v1@149.098,112.395 ; 148.844,112.395 v1@149.098,112.395
EIRQ2: J1.50 RN3.3 U23.13 | length 207.8
  F.Cu w0.254: RN3.3@109.22,53.975 111.887,53.975 112.395,53.975 112.776,54.356 112.776,87.757 113.792,88.773 v1(113.792,91.567) ; v1(238.379,88.519) 238.887,89.027 241.3,89.027 ; 240.157,89.027 241.3,89.027 ; v1(249.301,69.342) 249.301,86.614 246.888,89.027 241.3,89.027
  B.Cu w0.254: U23.13@104.14,53.975 105.271,53.975 RN3.3@109.22,53.975 ; v1(113.792,91.567) 114.427,90.932 208.407,90.932 209.55,92.075 236.474,92.075 237.363,91.186 237.363,89.535 v1(238.379,88.519) ; J1.50@246.38,68.961 248.158,68.961 248.539,69.342 v1(249.301,69.342)
EIRQ3: J1.46 RN3.11 U23.5 | length 209.9
  F.Cu w0.254: v1(222.25,38.227) v1(222.25,46.355) ; J1.46@246.38,78.613 247.65,78.613 248.412,77.851 248.412,71.501 248.158,71.247 248.158,67.818 248.666,67.31 v1(248.666,53.34)
  B.Cu w0.254: U23.5@96.52,46.355 101.6,46.355 102.87,45.085 114.439,45.085 115.709,46.355 RN3.11@116.84,46.355 126.619,46.355 129.286,49.022 201.676,49.022 204.216,46.482 204.343,46.355 220.599,46.355 v1(222.25,46.355) ; v1(222.25,38.227) 222.885,37.592 226.568,37.592 ; 225.425,37.592 226.568,37.592 ; 242.443,35.433 242.316,35.433 ; v1(248.666,53.34) 248.666,37.338 246.761,35.433 242.316,35.433 ; 226.568,37.592 238.125,37.592 240.284,35.433 242.316,35.433
EIRQ4: J1.55 RN3.13 U23.3 | length 241
  F.Cu w0.254: v1(112.268,50.165) 112.268,52.578 113.665,53.975 113.665,87.757 115.57,89.662 v1(115.57,92.329) ; v1(211.455,93.345) 212.852,91.948 212.852,56.134 v1(211.963,55.245)
  B.Cu w0.254: U23.3@96.52,51.435 101.6,51.435 102.87,50.165 v1(112.268,50.165) 112.903,50.165 114.3,50.165 115.57,51.435 RN3.13@116.84,51.435 ; v1(115.57,92.329) 116.459,91.44 117.729,91.44 127.127,91.44 129.54,91.44 153.035,91.44 175.851,91.44 176.022,91.44 176.232,91.44 196.723,91.44 205.74,91.44 207.816,91.44 209.721,93.345 v1(211.455,93.345) ; v1(211.963,55.245) 213.36,55.245 ; v1@212.471,55.245 213.36,55.245 ; 227.139,60.515 227.584,60.515 ; J1.55@246.507,56.921 245.237,58.191 245.237,58.928 244.792,59.372 243.091,59.372 241.897,60.566 240.932,60.566 240.881,60.515 240.474,60.515 227.584,60.515 ; 213.36,55.245 218.948,55.245 224.218,60.515 227.584,60.515
EIRQ5: J1.54 RN3.15 U23.1 | length 303.3
  F.Cu w0.254: v1(111.506,55.245) 112.141,55.88 112.141,67.52 111.887,67.774 v1(111.887,90.678) ; v1(209.931,90.932) 209.931,116.936 v3(209.931,117.475) ; v1(250.825,53.34) v1(250.825,56.896)
  B.Cu w0.254: U23.1@96.52,56.515 101.346,56.515 102.616,55.245 v1(111.506,55.245) 114.439,55.245 115.709,56.515 RN3.15@116.84,56.515 ; v1(111.887,90.678) 112.141,90.424 114.173,90.424 ; 113.03,90.424 114.173,90.424 ; v1(209.931,90.932) 209.423,90.424 208.153,90.424 114.173,90.424 ; v3(209.931,117.475) 210.566,117.475 211.836,116.205 211.963,116.205 222.25,116.205 225.552,116.205 227.203,117.856 227.203,119.126 227.33,119.253 227.711,119.634 236.855,119.634 237.49,118.999 240.284,116.205 251.968,116.205 252.603,115.57 252.603,54.579 251.364,53.34 v1(250.825,53.34) ; J1.54@246.38,59.309 249.682,59.309 250.825,58.166 v1(250.825,56.896)
EIRQ6: J1.1 RN3.5 U23.11 | length 191.2
  F.Cu w0.254: v1(227.584,84.582) 228.482,84.582 229.362,83.702 229.362,83.439 229.362,80.205 229.997,79.57 229.997,78.74 235.712,73.025 235.712,72.263 236.855,71.12 236.855,71.076 236.855,61.214 237.49,60.579 v1(237.49,49.53)
  B.Cu w0.254: U23.11@104.14,48.895 105.271,48.895 RN3.5@109.22,48.895 114.3,48.895 115.57,50.165 120.777,50.165 121.412,49.53 122.091,49.53 201.93,49.53 204.089,47.371 223.012,47.371 224.663,45.72 228.966,45.72 232.776,49.53 235.712,49.53 v1(237.49,49.53) ; v1(227.584,84.582) 228.854,85.852 229.997,85.852 J1.1@241.3,85.852
EIRQ7: J1.43 RN3.7 U23.9 | length 257.6
  F.Cu w0.254: U23.9@104.14,43.815 105.271,43.815 106.045,44.589 106.045,56.515 107.315,57.785 110.617,57.785 111.506,58.674 111.506,59.563 ; 111.506,59.436 111.506,59.563 ; 134.239,120.269 134.366,120.269 ; v1(235.585,107.315) 235.585,114.554 236.22,115.189 236.22,119.38 235.331,120.269 214.503,120.269 209.804,120.269 134.366,120.269 ; 111.506,59.563 111.506,67.437 110.998,67.945 110.998,89.662 109.982,90.678 109.982,92.329 113.411,95.758 113.411,118.999 114.681,120.269 134.366,120.269
  B.Cu w0.254: U23.9@104.14,43.815 RN3.7@109.22,43.815 ; v1(235.585,107.315) 238.76,107.315 240.03,108.585 242.824,108.585 248.031,103.378 248.031,89.662 246.38,88.011 246.38,87.019 J1.43@246.38,85.852
EMEM_IN_EXP: J1.6 U18.12 | length 105.5
  F.Cu w0.254: v1(162.052,56.515) 162.052,63.596 v1(162.052,64.135)
  B.Cu w0.254: U18.12@154.94,56.515 v1(162.052,56.515) ; v1(162.052,64.135) 163.322,62.865 183.134,62.865 184.277,61.722 185.801,61.722 ; 185.674,61.722 185.801,61.722 ; J1.6@241.3,73.787 240.133,73.787 239.244,72.898 235.338,72.898 234.678,73.558 233.07,73.558 232.537,73.025 192.811,73.025 191.897,72.111 191.897,63.754 189.865,61.722 185.801,61.722
EMEMR#: J1.34 U18.7 | length 127.8
  F.Cu w0.254: v1(145.669,51.562) 145.669,53.213 ; v1@145.669,51.689 145.669,52.197 145.669,53.213 ; U18.7@147.32,61.595 146.189,61.595 145.923,61.329 145.923,53.467 145.669,53.213 ; v1(228.473,58.166) 229.235,57.404 229.235,54.102 ; v1(229.235,47.879) 229.235,48.777 229.235,54.102 ; 229.235,51.571 229.235,54.102
  B.Cu w0.254: v1(145.669,51.562) 149.098,51.562 150.241,52.705 152.019,52.705 153.035,51.689 188.849,51.689 189.103,51.943 211.963,51.943 212.769,51.943 213.189,51.943 216.745,48.387 228.346,48.387 228.727,48.387 v1(229.235,47.879) ; v1(228.473,58.166) 228.536,58.102 229.679,58.102 240.03,58.102 240.068,58.141 J1.34@243.967,58.141